# Altium PCB STM32F302VC_EVM.PcbDoc (part 5 of 19)
Units mil, origin at the board's own origin, x right, y up, seen from the top; angles counter-clockwise.
Board outline 3937.01 x 3937.01 mil, 2 copper layers (Top Layer, Bottom Layer); 117 components, 166 nets, 602 pads, 373 vias.
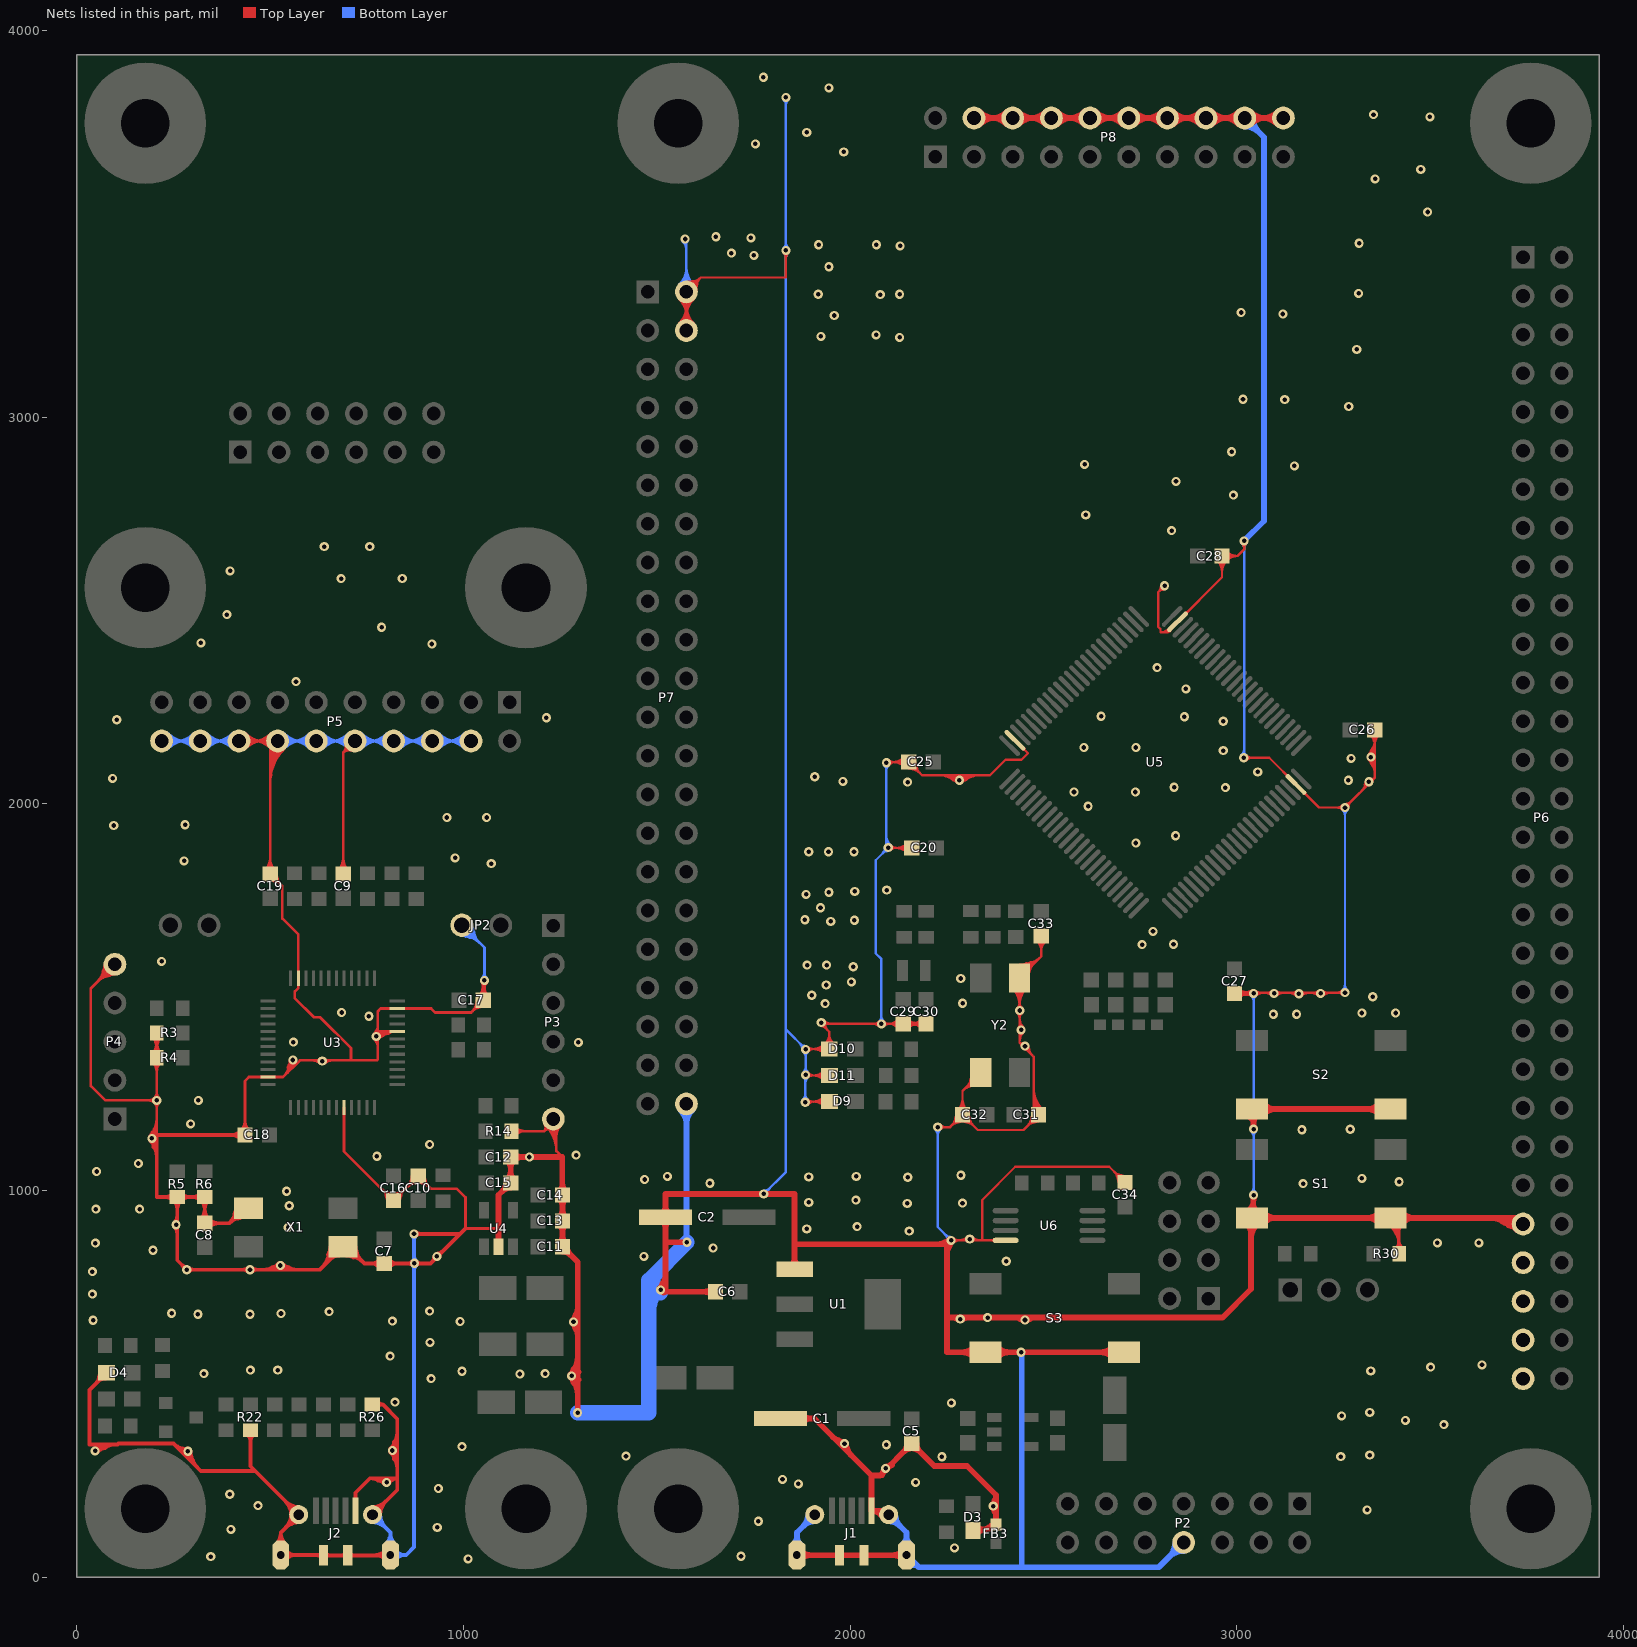
[diagram p5: the nets of this part, all layers, seen from the top]

## Via types
v1: diameter 23.62, hole 11.81, Top Layer to Bottom Layer, tented both sides, 372 vias
v2: diameter 50, hole 28, Top Layer to Bottom Layer, tented both sides, 1 vias

## Nets (pads, with @x,y where several pads share a name; then routed paths per layer and width w, separated by ;. In a path a pad name is that pad's centre, name@x,y a point inside that pad or via, vN(x,y) a via of type N, cw(c..) or ccw(c..) an arc to the next point about the centre after c; other vN are vias at no path point) (continued)
GND: (continued)
  Top Layer w7: P4.5@98.43,1585.04 36.42,1523.03 36.42,1270.54 73.69,1233.27 v1(206.69,1233.27) ; 206.69,1104.33 R4.1@206.69,1343.5 ; P5.16@419.29,2162.6 P5.14@519.29,2162.6 500,2143.31 C19.1@500,1818.9 531.5,1787.4 531.5,1703.58 572.83,1662.24 U3.35@572.83,1549.21 572.83,1523.62 563.98,1514.76 563.98,1497.05 612.98,1448.04 629.4,1448.04 709,1368.44 709,1336.61 ; C18.1@435.04,1143.7 435.04,1283.46 444.88,1293.31 U3.47@494.09,1293.31 533.46,1293.31 ; 511.3,2133.61 ccw(c503.49,2157.85) P5.14@527.88,2165.18 ; v1@551.04,1334.89 cw(c541.64,1331.65) 548.96,1324.92 cw(c558.91,1315.77) v1@558.9,1329.29 ; C9.2@688.98,1818.9 688.98,2132.28 ; U3.8@690.94,1214.57 690.94,1101.38 817.91,974.41 C16.1@818.9,974.41 819.88,974.41 C10.1@882.87,1037.4 915.35,1004.92 982.28,1004.92 1004.92,982.28 1004.92,901.57 1089.57,901.57 ; P5.10@719.29,2162.6 688.98,2132.28 ; 778.54,1411.42 U3.20@828.74,1411.42 ; v1(1054.13,1543.31) 1054.13,1495.08 C17.1@1051.18,1492.13 1019.68,1460.63 926.18,1460.63 916.34,1470.47 U3.23@828.74,1470.47 785.43,1470.47 778.54,1463.58 778.54,1339.57 775.59,1336.61 576.77,1336.61 533.46,1293.31 ; R14.1@1124.02,1153.54 1208.66,1153.54 ; 1255.61,1086.61 1240.16,1102.06 1240.16,1185.04 1208.66,1153.54 ; 53.99,1540.61 cw(c98.43,1496.18) P4.5@98.43,1559.01 ; 53.99,1540.61 ccw(c9.56,1585.04) P4.5@72.4,1585.04 ; 53.99,1540.61 ccw(c9.56,1585.04) P4.5@72.4,1585.04 ; 53.99,1540.61 cw(c98.43,1496.18) P4.5@98.43,1559.01 ; 53.99,1540.61 ccw(c9.56,1585.04) P4.5@72.4,1585.04 ; 53.99,1540.61 cw(c98.43,1496.18) P4.5@98.43,1559.01 ; 64.44,1555.33 cw(c106.84,1543.97) P4.5@98.03,1586.97 ; 64.44,1555.33 cw(c106.84,1543.97) P4.5@98.03,1586.97 ; 64.44,1555.33 cw(c106.84,1543.97) P4.5@98.03,1586.97 ; 65.94,1552.56 cw(c98.43,1520.08) P4.5@98.43,1566.01 ; 65.94,1552.56 ccw(c33.46,1585.04) P4.5@79.4,1585.04 ; 65.94,1552.56 ccw(c33.46,1585.04) P4.5@79.4,1585.04 ; 65.94,1552.56 cw(c98.43,1520.08) P4.5@98.43,1566.01 ; 65.94,1552.56 ccw(c33.46,1585.04) P4.5@79.4,1585.04 ; 65.94,1552.56 cw(c98.43,1520.08) P4.5@98.43,1566.01 ; 67.37,1566.27 cw(c104.29,1556.38) P4.5@96.63,1593.83 ; 67.37,1566.27 cw(c104.29,1556.38) P4.5@96.63,1593.83 ; 67.37,1566.27 cw(c104.29,1556.38) P4.5@96.63,1593.83 ; 68.72,1551.05 ccw(c57.36,1593.45) P4.5@100.36,1584.64 ; 68.72,1551.05 ccw(c57.36,1593.45) P4.5@100.36,1584.64 ; 68.72,1551.05 ccw(c57.36,1593.45) P4.5@100.36,1584.64 ; 72.36,1559.03 ccw(c65,1586.48) P4.5@93.4,1585.26 ; 72.36,1559.03 ccw(c65,1586.48) P4.5@93.4,1585.26 ; 72.36,1559.03 ccw(c65,1586.48) P4.5@93.4,1585.26 ; 72.41,1558.98 cw(c99.87,1551.62) P4.5@98.64,1580.02 ; 72.41,1558.98 cw(c99.87,1551.62) P4.5@98.64,1580.02 ; 72.41,1558.98 cw(c99.87,1551.62) P4.5@98.64,1580.02 ; 79.66,1553.98 ccw(c69.77,1590.91) P4.5@107.22,1583.24 ; 79.66,1553.98 ccw(c69.77,1590.91) P4.5@107.22,1583.24 ; 79.66,1553.98 ccw(c69.77,1590.91) P4.5@107.22,1583.24 ; 186.63,1233.27 cw(c186.63,1213.2) v1@200.82,1227.39 ; 186.63,1233.27 ccw(c186.63,1253.33) v1@200.82,1239.14 ; 186.63,1233.27 ccw(c186.63,1253.33) v1@200.82,1239.14 ; 186.63,1233.27 cw(c186.63,1213.2) v1@200.82,1227.39 ; 186.63,1233.27 ccw(c186.63,1253.33) v1@200.82,1239.14 ; 186.63,1233.27 cw(c186.63,1213.2) v1@200.82,1227.39 ; v1@188.13,1140.72 ccw(c143.33,1185.52) 206.69,1185.52 ; v1@188.13,1140.72 ccw(c143.33,1185.52) 206.69,1185.52 ; v1@188.13,1140.72 ccw(c143.33,1185.52) 206.69,1185.52 ; v1@190.48,1127.32 cw(c178.51,1101.8) 206.69,1101.8 ; v1@190.48,1127.32 cw(c178.51,1101.8) 206.69,1101.8 ; v1@190.48,1127.32 cw(c178.51,1101.8) 206.69,1101.8 ; v1@191.86,1142.87 ccw(c187.79,1158.08) 201.42,1150.2 ; v1@191.86,1142.87 ccw(c187.79,1158.08) 201.42,1150.2 ; v1@191.86,1142.87 ccw(c187.79,1158.08) 201.42,1150.2 ; v1@193.08,1135.77 ccw(c160.23,1168.63) 206.69,1168.63 ; v1@193.08,1135.77 ccw(c160.23,1168.63) 206.69,1168.63 ; v1@193.08,1135.77 ccw(c160.23,1168.63) 206.69,1168.63 ; v1@193.45,1133.66 cw(c183.68,1112.82) 206.69,1112.82 ; v1@193.45,1133.66 cw(c183.68,1112.82) 206.69,1112.82 ; v1@193.45,1133.66 cw(c183.68,1112.82) 206.69,1112.82 ; v1@195.09,1134.11 ccw(c202.62,1128.99) 196.75,1122.03 ; v1@195.09,1134.11 ccw(c202.62,1128.99) 196.75,1122.03 ; v1@195.09,1134.11 ccw(c202.62,1128.99) 196.75,1122.03 ; v1@195.13,1135.52 cw(c208.77,1143.76) 195.23,1152.16 ; v1@195.13,1135.52 cw(c208.77,1143.76) 195.23,1152.16 ; v1@195.13,1135.52 cw(c208.77,1143.76) 195.23,1152.16 ; v1@196.43,1139.99 cw(c188.85,1123.84) 206.69,1123.84 ; v1@196.43,1139.99 cw(c188.85,1123.84) 206.69,1123.84 ; v1@196.43,1139.99 cw(c188.85,1123.84) 206.69,1123.84 ; v1@196.6,1142.74 ccw(c199.42,1151.35) 207.27,1146.82 ; v1@196.6,1142.74 ccw(c199.42,1151.35) 207.27,1146.82 ; v1@196.6,1142.74 ccw(c199.42,1151.35) 207.27,1146.82 ; R4.1@196.64,1331.48 cw(c172.37,1307.21) 206.69,1307.21 ; R4.1@196.64,1331.48 cw(c172.37,1307.21) 206.69,1307.21 ; R4.1@196.64,1331.48 cw(c172.37,1307.21) 206.69,1307.21 ; v1@196.69,1126.97 cw(c198.7,1121.06) 202.73,1125.84 ; v1@196.69,1126.97 cw(c198.7,1121.06) 202.73,1125.84 ; v1@196.69,1126.97 cw(c198.7,1121.06) 202.73,1125.84 ; v1@198.03,1130.82 ccw(c177.13,1151.73) 206.69,1151.73 ; v1@198.03,1130.82 ccw(c177.13,1151.73) 206.69,1151.73 ; v1@198.03,1130.82 ccw(c177.13,1151.73) 206.69,1151.73 ; v1@200.82,1227.39 cw(c186.63,1213.2) 206.69,1213.2 ; v1@200.82,1227.39 cw(c186.63,1213.2) 206.69,1213.2 ; v1@200.82,1227.39 cw(c186.63,1213.2) 206.69,1213.2 ; v1@200.82,1239.14 ccw(c186.63,1253.33) 206.69,1253.33 ; v1@200.82,1239.14 ccw(c186.63,1253.33) 206.69,1253.33 ; v1@200.82,1239.14 ccw(c186.63,1253.33) 206.69,1253.33 ; v1@200.88,1130.17 ccw(c209.07,1124.6) 202.69,1117.03 ; v1@200.88,1130.17 ccw(c209.07,1124.6) 202.69,1117.03 ; v1@200.88,1130.17 ccw(c209.07,1124.6) 202.69,1117.03 ; v1@201.12,1139.14 cw(c219.77,1150.4) 201.26,1161.88 ; v1@201.12,1139.14 cw(c219.77,1150.4) 201.26,1161.88 ; v1@201.12,1139.14 cw(c219.77,1150.4) 201.26,1161.88 ; v1@201.53,1131.31 ccw(c205.69,1129.35) 202.73,1125.84 ; v1@201.53,1131.31 ccw(c205.69,1129.35) 202.73,1125.84 ; v1@201.53,1131.31 ccw(c205.69,1129.35) 202.73,1125.84 ; v1@202.04,1136.99 cw(c225.6,1143.31) 204.47,1155.5 ; v1@202.04,1136.99 cw(c225.6,1143.31) 204.47,1155.5 ; v1@202.04,1136.99 cw(c225.6,1143.31) 204.47,1155.5 ; 206.69,1213.2 cw(c226.76,1213.2) v1@212.57,1227.39 ; 206.69,1213.2 cw(c226.76,1213.2) v1@212.57,1227.39 ; 206.69,1213.2 cw(c226.76,1213.2) v1@212.57,1227.39 ; 206.69,1253.33 ccw(c226.76,1253.33) v1@212.57,1239.14 ; 206.69,1253.33 ccw(c226.76,1253.33) v1@212.57,1239.14 ; 206.69,1253.33 ccw(c226.76,1253.33) v1@212.57,1239.14 ; 206.69,1307.21 cw(c241.01,1307.21) R4.1@216.75,1331.48 ; 206.69,1307.21 cw(c241.01,1307.21) R4.1@216.75,1331.48 ; 206.69,1307.21 cw(c241.01,1307.21) R4.1@216.75,1331.48 ; C18.1@423.59,1155.15 ccw(c395.97,1182.77) 435.04,1182.77 ; C18.1@423.59,1155.15 ccw(c395.97,1182.77) 435.04,1182.77 ; C18.1@423.59,1155.15 ccw(c395.97,1182.77) 435.04,1182.77 ; C18.1@428.54,1150.2 ccw(c412.86,1165.88) 435.04,1165.88 ; C18.1@428.54,1150.2 ccw(c412.86,1165.88) 435.04,1165.88 ; C18.1@428.54,1150.2 ccw(c412.86,1165.88) 435.04,1165.88 ; P5.16@432.75,2149.14 cw(c465.23,2116.66) 465.23,2162.6 ; P5.16@432.75,2149.14 cw(c465.23,2116.66) 465.23,2162.6 ; P5.16@432.75,2149.14 cw(c465.23,2116.66) 465.23,2162.6 ; P5.16@432.75,2176.05 ccw(c465.23,2208.53) 465.23,2162.6 ; P5.16@432.75,2176.05 ccw(c465.23,2208.53) 465.23,2162.6 ; P5.16@432.75,2176.05 ccw(c465.23,2208.53) 465.23,2162.6 ; 435.04,1165.88 ccw(c457.21,1165.88) C18.1@441.53,1150.2 ; 435.04,1165.88 ccw(c457.21,1165.88) C18.1@441.53,1150.2 ; 435.04,1165.88 ccw(c457.21,1165.88) C18.1@441.53,1150.2 ; 435.04,1182.77 ccw(c474.11,1182.77) C18.1@446.48,1155.15 ; 435.04,1182.77 ccw(c474.11,1182.77) C18.1@446.48,1155.15 ; 435.04,1182.77 ccw(c474.11,1182.77) C18.1@446.48,1155.15 ; P5.16@437.7,2144.19 cw(c482.13,2099.76) 482.13,2162.6 ; P5.16@437.7,2144.19 cw(c482.13,2099.76) 482.13,2162.6 ; P5.16@437.7,2144.19 cw(c482.13,2099.76) 482.13,2162.6 ; P5.16@437.7,2181 ccw(c482.13,2225.43) 482.13,2162.6 ; P5.16@437.7,2181 ccw(c482.13,2225.43) 482.13,2162.6 ; P5.16@437.7,2181 ccw(c482.13,2225.43) 482.13,2162.6 ; 456.46,2162.6 cw(c456.46,2099.76) P5.14@500.89,2144.19 ; 456.46,2162.6 ccw(c456.46,2225.43) P5.14@500.89,2181 ; 456.46,2162.6 ccw(c456.46,2225.43) P5.14@500.89,2181 ; 456.46,2162.6 cw(c456.46,2099.76) P5.14@500.89,2144.19 ; 456.46,2162.6 ccw(c456.46,2225.43) P5.14@500.89,2181 ; 456.46,2162.6 cw(c456.46,2099.76) P5.14@500.89,2144.19 ; 473.35,2162.6 cw(c473.35,2116.66) P5.14@505.84,2149.14 ; 473.35,2162.6 ccw(c473.35,2208.53) P5.14@505.84,2176.05 ; 473.35,2162.6 ccw(c473.35,2208.53) P5.14@505.84,2176.05 ; 473.35,2162.6 cw(c473.35,2116.66) P5.14@505.84,2149.14 ; 473.35,2162.6 ccw(c473.35,2208.53) P5.14@505.84,2176.05 ; 473.35,2162.6 cw(c473.35,2116.66) P5.14@505.84,2149.14 ; C19.1@488.56,1830.34 ccw(c460.93,1857.97) 500,1857.97 ; C19.1@488.56,1830.34 ccw(c460.93,1857.97) 500,1857.97 ; C19.1@488.56,1830.34 ccw(c460.93,1857.97) 500,1857.97 ; C19.1@493.51,1825.39 ccw(c477.83,1841.07) 500,1841.07 ; C19.1@493.51,1825.39 ccw(c477.83,1841.07) 500,1841.07 ; C19.1@493.51,1825.39 ccw(c477.83,1841.07) 500,1841.07 ; C19.1@495.28,1817.93 ccw(c519.18,1822.82) C19.1@512.86,1799.27 ; C19.1@495.28,1817.93 ccw(c519.18,1822.82) C19.1@512.86,1799.27 ; C19.1@495.28,1817.93 ccw(c519.18,1822.82) C19.1@512.86,1799.27 ; C19.1@500,1802.71 cw(c500,1763.64) 527.63,1791.27 ; C19.1@500,1802.71 cw(c500,1763.64) 527.63,1791.27 ; C19.1@500,1802.71 cw(c500,1763.64) 527.63,1791.27 ; C19.1@500,1809.71 cw(c500,1787.54) C19.1@515.68,1803.22 ; C19.1@500,1809.71 cw(c500,1787.54) C19.1@515.68,1803.22 ; C19.1@500,1809.71 cw(c500,1787.54) C19.1@515.68,1803.22 ; 500,1841.07 ccw(c522.17,1841.07) C19.1@506.49,1825.39 ; 500,1841.07 ccw(c522.17,1841.07) C19.1@506.49,1825.39 ; 500,1841.07 ccw(c522.17,1841.07) C19.1@506.49,1825.39 ; 500,1857.97 ccw(c539.07,1857.97) C19.1@511.44,1830.34 ; 500,1857.97 ccw(c539.07,1857.97) C19.1@511.44,1830.34 ; 500,1857.97 ccw(c539.07,1857.97) C19.1@511.44,1830.34 ; 500,2053.19 cw(c628.7,2053.19) P5.14@537.7,2144.19 ; 500,2053.19 cw(c628.7,2053.19) P5.14@537.7,2144.19 ; 500,2053.19 cw(c628.7,2053.19) P5.14@537.7,2144.19 ; 500,2070.09 cw(c611.8,2070.09) P5.14@532.75,2149.14 ; 500,2070.09 cw(c611.8,2070.09) P5.14@532.75,2149.14 ; 500,2070.09 cw(c611.8,2070.09) P5.14@532.75,2149.14 ; 500,2086.99 cw(c594.9,2086.99) P5.14@527.8,2154.09 ; 500,2086.99 cw(c594.9,2086.99) P5.14@527.8,2154.09 ; 500,2086.99 cw(c594.9,2086.99) P5.14@527.8,2154.09 ; 500,2103.89 cw(c578,2103.89) P5.14@522.85,2159.04 ; 500,2103.89 cw(c578,2103.89) P5.14@522.85,2159.04 ; 500,2103.89 cw(c578,2103.89) P5.14@522.85,2159.04 ; 500,2120.79 cw(c561.1,2120.79) P5.14@517.9,2163.99 ; 500,2120.79 cw(c561.1,2120.79) P5.14@517.9,2163.99 ; 500,2120.79 cw(c561.1,2120.79) P5.14@517.9,2163.99 ; 500,2137.69 cw(c544.2,2137.69) P5.14@512.95,2168.94 ; 500,2137.69 cw(c544.2,2137.69) P5.14@512.95,2168.94 ; 500,2137.69 cw(c544.2,2137.69) P5.14@512.95,2168.94 ; P5.14@500.46,2144.63 cw(c494.99,2139.42) 501.53,2135.65 ; P5.14@500.46,2144.63 cw(c494.99,2139.42) 501.53,2135.65 ; P5.14@500.46,2144.63 cw(c494.99,2139.42) 501.53,2135.65 ; C19.1@500.97,1823.61 cw(c496.07,1799.72) C19.1@519.63,1806.03 ; C19.1@500.97,1823.61 cw(c496.07,1799.72) C19.1@519.63,1806.03 ; C19.1@500.97,1823.61 cw(c496.07,1799.72) C19.1@519.63,1806.03 ; P5.14@501.52,2143.58 cw(c492.04,2133.44) 504.06,2126.51 ; P5.14@501.52,2143.58 cw(c492.04,2133.44) 504.06,2126.51 ; P5.14@501.52,2143.58 cw(c492.04,2133.44) 504.06,2126.51 ; 501.53,2135.65 cw(c507.18,2132.39) P5.14@509.6,2138.44 ; 501.53,2135.65 cw(c507.18,2132.39) P5.14@509.6,2138.44 ; 501.53,2135.65 cw(c507.18,2132.39) P5.14@509.6,2138.44 ; P5.14@502.81,2142.46 cw(c491.16,2128.22) 507,2118.87 ; P5.14@502.81,2142.46 cw(c491.16,2128.22) 507,2118.87 ; P5.14@502.81,2142.46 cw(c491.16,2128.22) 507,2118.87 ; 504.06,2126.51 cw(c521.59,2116.38) P5.14@520.59,2136.6 ; 504.06,2126.51 cw(c521.59,2116.38) P5.14@520.59,2136.6 ; 504.06,2126.51 cw(c521.59,2116.38) P5.14@520.59,2136.6 ; P5.14@506.3,2148.7 cw(c498.22,2140.05) 508.47,2134.14 ; P5.14@506.3,2148.7 cw(c498.22,2140.05) 508.47,2134.14 ; P5.14@506.3,2148.7 cw(c498.22,2140.05) 508.47,2134.14 ; P5.14@507.24,2147.87 cw(c496.39,2134.61) 511.15,2125.89 ; P5.14@507.24,2147.87 cw(c496.39,2134.61) 511.15,2125.89 ; P5.14@507.24,2147.87 cw(c496.39,2134.61) 511.15,2125.89 ; C19.1@509.18,1818.9 ccw(c531.36,1818.9) C19.1@515.68,1803.22 ; C19.1@509.18,1818.9 ccw(c531.36,1818.9) C19.1@515.68,1803.22 ; C19.1@509.18,1818.9 ccw(c531.36,1818.9) C19.1@515.68,1803.22 ; 511.67,2126.78 cw(c531.53,2115.05) P5.14@525.78,2137.39 ; 511.67,2126.78 cw(c531.53,2115.05) P5.14@525.78,2137.39 ; 511.67,2126.78 cw(c531.53,2115.05) P5.14@525.78,2137.39 ; P5.14@511.67,2153.29 cw(c501.61,2141) 515.29,2132.92 ; P5.14@511.67,2153.29 cw(c501.61,2141) 515.29,2132.92 ; P5.14@511.67,2153.29 cw(c501.61,2141) 515.29,2132.92 ; C19.1@516.18,1818.9 ccw(c555.26,1818.9) 527.63,1791.27 ; C19.1@516.18,1818.9 ccw(c555.26,1818.9) 527.63,1791.27 ; C19.1@516.18,1818.9 ccw(c555.26,1818.9) 527.63,1791.27 ; 533.47,1293.31 ccw(c491.99,1334.78) v1@550.59,1337.25 ; 533.47,1293.31 ccw(c491.99,1334.78) v1@550.59,1337.25 ; 533.47,1293.31 ccw(c491.99,1334.78) v1@550.59,1337.25 ; 544.74,1304.58 ccw(c513.63,1335.69) v1@557.59,1337.54 ; 544.74,1304.58 ccw(c513.63,1335.69) v1@557.59,1337.54 ; 544.74,1304.58 ccw(c513.63,1335.69) v1@557.59,1337.54 ; 546.15,1317.34 cw(c575.99,1310.68) v1@559.6,1336.49 ; 546.15,1317.34 cw(c575.99,1310.68) v1@559.6,1336.49 ; 546.15,1317.34 cw(c575.99,1310.68) v1@559.6,1336.49 ; v1@551.88,1333.14 cw(c538.59,1324.71) 553.95,1321.28 ; v1@551.88,1333.14 cw(c538.59,1324.71) 553.95,1321.28 ; v1@551.88,1333.14 cw(c538.59,1324.71) 553.95,1321.28 ; 552.62,1315.31 cw(c576.42,1309.99) v1@563.35,1330.58 ; 552.62,1315.31 cw(c576.42,1309.99) v1@563.35,1330.58 ; 552.62,1315.31 cw(c576.42,1309.99) v1@563.35,1330.58 ; 556.01,1315.86 ccw(c535.26,1336.6) v1@564.58,1337.84 ; 556.01,1315.86 ccw(c535.26,1336.6) v1@564.58,1337.84 ; 556.01,1315.86 ccw(c535.26,1336.6) v1@564.58,1337.84 ; 610.03,1336.61 cw(c610.03,1309.83) v1@628.97,1328.77 ; 610.03,1336.61 cw(c610.03,1309.83) v1@628.97,1328.77 ; 610.03,1336.61 cw(c610.03,1309.83) v1@628.97,1328.77 ; 619.53,1336.61 ccw(c619.53,1349.96) v1@628.97,1340.52 ; 619.53,1336.61 ccw(c619.53,1349.96) v1@628.97,1340.52 ; 619.53,1336.61 ccw(c619.53,1349.96) v1@628.97,1340.52 ; v1@640.72,1328.77 cw(c659.66,1309.83) 659.66,1336.61 ; v1@640.72,1328.77 cw(c659.66,1309.83) 659.66,1336.61 ; v1@640.72,1328.77 cw(c659.66,1309.83) 659.66,1336.61 ; v1@640.72,1340.52 ccw(c650.15,1349.96) 650.15,1336.61 ; v1@640.72,1340.52 ccw(c650.15,1349.96) 650.15,1336.61 ; v1@640.72,1340.52 ccw(c650.15,1349.96) 650.15,1336.61 ; C9.2@677.53,1830.34 ccw(c649.9,1857.97) 688.98,1857.97 ; C9.2@677.53,1830.34 ccw(c649.9,1857.97) 688.98,1857.97 ; C9.2@677.53,1830.34 ccw(c649.9,1857.97) 688.98,1857.97 ; C9.2@682.48,1825.39 ccw(c666.8,1841.07) 688.98,1841.07 ; C9.2@682.48,1825.39 ccw(c666.8,1841.07) 688.98,1841.07 ; C9.2@682.48,1825.39 ccw(c666.8,1841.07) 688.98,1841.07 ; 688.98,1841.07 ccw(c711.15,1841.07) C9.2@695.47,1825.39 ; 688.98,1841.07 ccw(c711.15,1841.07) C9.2@695.47,1825.39 ; 688.98,1841.07 ccw(c711.15,1841.07) C9.2@695.47,1825.39 ; 688.98,1857.97 ccw(c728.05,1857.97) C9.2@700.42,1830.34 ; 688.98,1857.97 ccw(c728.05,1857.97) C9.2@700.42,1830.34 ; 688.98,1857.97 ccw(c728.05,1857.97) C9.2@700.42,1830.34 ; 688.98,2132.28 cw(c704.74,2116.52) P5.10@711.45,2137.78 ; 688.98,2132.28 ccw(c673.21,2148.05) P5.10@694.47,2154.76 ; 688.98,2132.28 ccw(c673.21,2148.05) P5.10@694.47,2154.76 ; 688.98,2132.28 cw(c704.74,2116.52) P5.10@711.45,2137.78 ; 688.98,2132.28 ccw(c673.21,2148.05) P5.10@694.47,2154.76 ; 688.98,2132.28 cw(c704.74,2116.52) P5.10@711.45,2137.78 ; 697.13,2140.44 cw(c708.65,2128.91) P5.10@713.56,2144.45 ; 697.13,2140.44 ccw(c685.61,2151.96) P5.10@701.15,2156.87 ; 697.13,2140.44 ccw(c685.61,2151.96) P5.10@701.15,2156.87 ; 697.13,2140.44 cw(c708.65,2128.91) P5.10@713.56,2144.45 ; 697.13,2140.44 ccw(c685.61,2151.96) P5.10@701.15,2156.87 ; 697.13,2140.44 cw(c708.65,2128.91) P5.10@713.56,2144.45 ; v1@768.55,1392.8 cw(c744.44,1368.68) 778.54,1368.68 ; v1@768.55,1392.8 cw(c744.44,1368.68) 778.54,1368.68 ; v1@768.55,1392.8 cw(c744.44,1368.68) 778.54,1368.68 ; v1@768.55,1404.55 ccw(c744.44,1428.67) 778.54,1428.67 ; v1@768.55,1404.55 ccw(c744.44,1428.67) 778.54,1428.67 ; v1@768.55,1404.55 ccw(c744.44,1428.67) 778.54,1428.67 ; v1@770.41,1402.7 cw(c791.45,1381.66) 791.45,1411.42 ; v1@770.41,1402.7 cw(c791.45,1381.66) 791.45,1411.42 ; v1@770.41,1402.7 cw(c791.45,1381.66) 791.45,1411.42 ; v1@773.5,1397.75 cw(c761.34,1385.58) 778.54,1385.58 ; v1@773.5,1397.75 cw(c761.34,1385.58) 778.54,1385.58 ; v1@773.5,1397.75 cw(c761.34,1385.58) 778.54,1385.58 ; v1@773.5,1399.6 ccw(c761.34,1411.77) 778.54,1411.77 ; v1@773.5,1399.6 ccw(c761.34,1411.77) 778.54,1411.77 ; v1@773.5,1399.6 ccw(c761.34,1411.77) 778.54,1411.77 ; v1@775.11,1399.8 ccw(c783.34,1413.46) 791.75,1399.91 ; v1@775.11,1399.8 ccw(c783.34,1413.46) 791.75,1399.91 ; v1@775.11,1399.8 ccw(c783.34,1413.46) 791.75,1399.91 ; v1@775.36,1397.75 cw(c808.35,1364.76) 808.35,1411.42 ; v1@775.36,1397.75 cw(c808.35,1364.76) 808.35,1411.42 ; v1@775.36,1397.75 cw(c808.35,1364.76) 808.35,1411.42 ; v1@776.58,1406.71 ccw(c782.89,1430.26) 795.09,1409.14 ; v1@776.58,1406.71 ccw(c782.89,1430.26) 795.09,1409.14 ; v1@776.58,1406.71 ccw(c782.89,1430.26) 795.09,1409.14 ; v1@778.72,1405.8 ccw(c789.97,1424.46) 801.47,1405.95 ; v1@778.72,1405.8 ccw(c789.97,1424.46) 801.47,1405.95 ; v1@778.72,1405.8 ccw(c789.97,1424.46) 801.47,1405.95 ; v1@780.31,1392.8 cw(c825.25,1347.86) U3.20@825.25,1411.42 ; v1@780.31,1392.8 cw(c825.25,1347.86) U3.20@825.25,1411.42 ; v1@780.31,1392.8 cw(c825.25,1347.86) U3.20@825.25,1411.42 ; v1@782.34,1401.22 cw(c791.09,1404.03) 786.5,1411.99 ; v1@782.34,1401.22 cw(c791.09,1404.03) 786.5,1411.99 ; v1@782.34,1401.22 cw(c791.09,1404.03) 786.5,1411.99 ; v1@782.46,1396.53 cw(c797.66,1392.45) 789.79,1406.08 ; v1@782.46,1396.53 cw(c797.66,1392.45) 789.79,1406.08 ; v1@782.46,1396.53 cw(c797.66,1392.45) 789.79,1406.08 ; 789.59,1002.74 ccw(c818.9,1032.05) C16.1@818.9,990.59 ; 789.59,1002.74 ccw(c818.9,1032.05) C16.1@818.9,990.59 ; 789.59,1002.74 ccw(c818.9,1032.05) C16.1@818.9,990.59 ; 791.96,1000.36 cw(c766.02,974.41) C16.1@802.71,974.41 ; 791.96,1000.36 cw(c766.02,974.41) C16.1@802.71,974.41 ; 791.96,1000.36 cw(c766.02,974.41) C16.1@802.71,974.41 ; C16.1@799.37,986.87 ccw(c822.29,993.01) C16.1@818.03,969.67 ; C16.1@799.37,986.87 ccw(c822.29,993.01) C16.1@818.03,969.67 ; C16.1@799.37,986.87 ccw(c822.29,993.01) C16.1@818.03,969.67 ; C16.1@801.54,990.79 ccw(c818.9,1008.15) C16.1@818.9,983.59 ; C16.1@801.54,990.79 ccw(c818.9,1008.15) C16.1@818.9,983.59 ; C16.1@801.54,990.79 ccw(c818.9,1008.15) C16.1@818.9,983.59 ; C16.1@803.91,988.41 cw(c789.92,974.41) C16.1@809.71,974.41 ; C16.1@803.91,988.41 cw(c789.92,974.41) C16.1@809.71,974.41 ; C16.1@803.91,988.41 cw(c789.92,974.41) C16.1@809.71,974.41 ; 805.4,1406.1 ccw(c802.32,1417.58) U3.20@812.61,1411.64 ; 805.4,1406.1 ccw(c802.32,1417.58) U3.20@812.61,1411.64 ; 805.4,1406.1 ccw(c802.32,1417.58) U3.20@812.61,1411.64 ; 805.63,994.15 cw(c799.14,969.93) C16.1@823.59,975.47 ; 805.63,994.15 cw(c799.14,969.93) C16.1@823.59,975.47 ; 805.63,994.15 cw(c799.14,969.93) C16.1@823.59,975.47 ; C16.1@814.2,975.47 cw(c838.66,969.93) 832.17,994.15 ; C16.1@814.2,975.47 cw(c838.66,969.93) 832.17,994.15 ; C16.1@814.2,975.47 cw(c838.66,969.93) 832.17,994.15 ; C16.1@818.9,983.59 ccw(c818.9,1008.15) C16.1@836.26,990.79 ; C16.1@818.9,983.59 ccw(c818.9,1008.15) C16.1@836.26,990.79 ; C16.1@818.9,983.59 ccw(c818.9,1008.15) C16.1@836.26,990.79 ; C16.1@818.9,990.59 ccw(c818.9,1032.05) 848.21,1002.74 ; C16.1@818.9,990.59 ccw(c818.9,1032.05) 848.21,1002.74 ; C16.1@818.9,990.59 ccw(c818.9,1032.05) 848.21,1002.74 ; C16.1@819.76,969.67 ccw(c815.51,993.01) C16.1@838.42,986.87 ; C16.1@819.76,969.67 ccw(c815.51,993.01) C16.1@838.42,986.87 ; C16.1@819.76,969.67 ccw(c815.51,993.01) C16.1@838.42,986.87 ; C16.1@828.08,974.41 cw(c847.88,974.41) C16.1@833.88,988.41 ; C16.1@828.08,974.41 cw(c847.88,974.41) C16.1@833.88,988.41 ; C16.1@828.08,974.41 cw(c847.88,974.41) C16.1@833.88,988.41 ; C16.1@835.08,974.41 cw(c871.78,974.41) 845.83,1000.36 ; C16.1@835.08,974.41 cw(c871.78,974.41) 845.83,1000.36 ; C16.1@835.08,974.41 cw(c871.78,974.41) 845.83,1000.36 ; 855.24,1009.77 cw(c882.87,982.14) C10.1@882.87,1021.22 ; 855.24,1009.77 ccw(c827.62,1037.4) C10.1@866.69,1037.4 ; 855.24,1009.77 ccw(c827.62,1037.4) C10.1@866.69,1037.4 ; 855.24,1009.77 cw(c882.87,982.14) C10.1@882.87,1021.22 ; 855.24,1009.77 ccw(c827.62,1037.4) C10.1@866.69,1037.4 ; 855.24,1009.77 cw(c882.87,982.14) C10.1@882.87,1021.22 ; C10.1@863.24,1024.54 cw(c886.8,1018.22) C10.1@881.91,1042.12 ; C10.1@863.24,1024.54 cw(c886.8,1018.22) C10.1@881.91,1042.12 ; C10.1@863.24,1024.54 cw(c886.8,1018.22) C10.1@881.91,1042.12 ; C10.1@867.19,1021.72 cw(c882.87,1006.04) C10.1@882.87,1028.22 ; C10.1@867.19,1021.72 ccw(c851.51,1037.4) C10.1@873.69,1037.4 ; C10.1@867.19,1021.72 ccw(c851.51,1037.4) C10.1@873.69,1037.4 ; C10.1@867.19,1021.72 cw(c882.87,1006.04) C10.1@882.87,1028.22 ; C10.1@867.19,1021.72 ccw(c851.51,1037.4) C10.1@873.69,1037.4 ; C10.1@867.19,1021.72 cw(c882.87,1006.04) C10.1@882.87,1028.22 ; C10.1@870.01,1017.77 ccw(c863.7,1041.33) C10.1@887.59,1036.44 ; C10.1@870.01,1017.77 ccw(c863.7,1041.33) C10.1@887.59,1036.44 ; C10.1@870.01,1017.77 ccw(c863.7,1041.33) C10.1@887.59,1036.44 ; C10.1@878.16,1036.44 ccw(c902.05,1041.33) C10.1@895.74,1017.77 ; C10.1@878.16,1036.44 ccw(c902.05,1041.33) C10.1@895.74,1017.77 ; C10.1@878.16,1036.44 ccw(c902.05,1041.33) C10.1@895.74,1017.77 ; C10.1@882.87,1021.22 cw(c882.87,982.14) 910.5,1009.77 ; C10.1@882.87,1021.22 cw(c882.87,982.14) 910.5,1009.77 ; C10.1@882.87,1021.22 cw(c882.87,982.14) 910.5,1009.77 ; C10.1@882.87,1028.22 cw(c882.87,1006.04) C10.1@898.55,1021.72 ; C10.1@882.87,1028.22 cw(c882.87,1006.04) C10.1@898.55,1021.72 ; C10.1@882.87,1028.22 cw(c882.87,1006.04) C10.1@898.55,1021.72 ; C10.1@883.84,1042.12 cw(c878.95,1018.22) C10.1@902.51,1024.54 ; C10.1@883.84,1042.12 cw(c878.95,1018.22) C10.1@902.51,1024.54 ; C10.1@883.84,1042.12 cw(c878.95,1018.22) C10.1@902.51,1024.54 ; C10.1@892.06,1037.4 ccw(c914.23,1037.4) C10.1@898.55,1021.72 ; C10.1@892.06,1037.4 ccw(c914.23,1037.4) C10.1@898.55,1021.72 ; C10.1@892.06,1037.4 ccw(c914.23,1037.4) C10.1@898.55,1021.72 ; C10.1@899.06,1037.4 ccw(c938.13,1037.4) 910.5,1009.77 ; C10.1@899.06,1037.4 ccw(c938.13,1037.4) 910.5,1009.77 ; C10.1@899.06,1037.4 ccw(c938.13,1037.4) 910.5,1009.77 ; 1023.55,1464.5 cw(c1051.18,1436.87) C17.1@1051.18,1475.94 ; 1023.55,1464.5 ccw(c995.92,1492.13) C17.1@1035,1492.13 ; 1023.55,1464.5 ccw(c995.92,1492.13) C17.1@1035,1492.13 ; 1023.55,1464.5 cw(c1051.18,1436.87) C17.1@1051.18,1475.94 ; 1023.55,1464.5 ccw(c995.92,1492.13) C17.1@1035,1492.13 ; 1023.55,1464.5 cw(c1051.18,1436.87) C17.1@1051.18,1475.94 ; C17.1@1031.55,1479.26 cw(c1055.11,1472.95) C17.1@1050.21,1496.84 ; C17.1@1031.55,1479.26 cw(c1055.11,1472.95) C17.1@1050.21,1496.84 ; C17.1@1031.55,1479.26 cw(c1055.11,1472.95) C17.1@1050.21,1496.84 ; C17.1@1035.5,1476.45 cw(c1051.18,1460.77) C17.1@1051.18,1482.94 ; C17.1@1035.5,1476.45 ccw(c1019.82,1492.13) C17.1@1042,1492.13 ; C17.1@1035.5,1476.45 ccw(c1019.82,1492.13) C17.1@1042,1492.13 ; C17.1@1035.5,1476.45 cw(c1051.18,1460.77) C17.1@1051.18,1482.94 ; C17.1@1035.5,1476.45 ccw(c1019.82,1492.13) C17.1@1042,1492.13 ; C17.1@1035.5,1476.45 cw(c1051.18,1460.77) C17.1@1051.18,1482.94 ; C17.1@1038.32,1472.49 ccw(c1032,1496.05) C17.1@1055.9,1491.16 ; C17.1@1038.32,1472.49 ccw(c1032,1496.05) C17.1@1055.9,1491.16 ; C17.1@1038.32,1472.49 ccw(c1032,1496.05) C17.1@1055.9,1491.16 ; C17.1@1039.74,1503.57 ccw(c1004.98,1538.33) v1@1054.13,1538.33 ; C17.1@1039.74,1503.57 ccw(c1004.98,1538.33) v1@1054.13,1538.33 ; C17.1@1039.74,1503.57 ccw(c1004.98,1538.33) v1@1054.13,1538.33 ; C17.1@1044.69,1498.62 ccw(c1021.88,1521.43) 1054.13,1521.43 ; C17.1@1044.69,1498.62 ccw(c1021.88,1521.43) 1054.13,1521.43 ; C17.1@1044.69,1498.62 ccw(c1021.88,1521.43) 1054.13,1521.43 ; v1@1046.94,1539.15 cw(c1025.75,1526.92) 1049.38,1520.59 ; v1@1046.94,1539.15 cw(c1025.75,1526.92) 1049.38,1520.59 ; v1@1046.94,1539.15 cw(c1025.75,1526.92) 1049.38,1520.59 ; v1@1046.94,1539.15 cw(c1025.75,1526.92) 1049.38,1520.59 ; v1@1046.94,1539.15 cw(c1025.75,1526.92) 1049.38,1520.59 ; v1@1046.94,1539.15 cw(c1025.75,1526.92) 1049.38,1520.59 ; v1@1048.26,1537.43 cw(c1034.07,1523.24) 1054.13,1523.24 ; v1@1048.26,1537.43 cw(c1034.07,1523.24) 1054.13,1523.24 ; v1@1048.26,1537.43 cw(c1034.07,1523.24) 1054.13,1523.24 ; 1050.99,1526.6 cw(c1066.12,1522.54) v1@1058.29,1536.11 ; 1050.99,1526.6 cw(c1066.12,1522.54) v1@1058.29,1536.11 ; 1050.99,1526.6 cw(c1066.12,1522.54) v1@1058.29,1536.11 ; 1050.99,1526.6 cw(c1066.12,1522.54) v1@1058.29,1536.11 ; 1050.99,1526.6 cw(c1066.12,1522.54) v1@1058.29,1536.11 ; 1050.99,1526.6 cw(c1066.12,1522.54) v1@1058.29,1536.11 ; 1054.13,1523.24 cw(c1074.2,1523.24) v1@1060.01,1537.43 ; 1054.13,1523.24 cw(c1074.2,1523.24) v1@1060.01,1537.43 ; 1054.13,1523.24 cw(c1074.2,1523.24) v1@1060.01,1537.43 ; 1054.13,1524.07 ccw(c1083.13,1524.07) C17.1@1062.63,1503.57 ; 1054.13,1524.07 ccw(c1083.13,1524.07) C17.1@1062.63,1503.57 ; 1054.13,1524.07 ccw(c1083.13,1524.07) C17.1@1062.63,1503.57 ; R14.1@1134.07,1143.49 cw(c1158.34,1119.22) 1158.34,1153.54 ; R14.1@1134.07,1143.49 cw(c1158.34,1119.22) 1158.34,1153.54 ; R14.1@1134.07,1143.49 cw(c1158.34,1119.22) 1158.34,1153.54 ; R14.1@1134.07,1163.6 ccw(c1158.34,1187.87) 1158.34,1153.54 ; R14.1@1134.07,1163.6 ccw(c1158.34,1187.87) 1158.34,1153.54 ; R14.1@1134.07,1163.6 ccw(c1158.34,1187.87) 1158.34,1153.54 ; 1208.66,1153.54 cw(c1223.74,1138.47) P3.6@1227.59,1159.44 ; 1208.66,1153.54 ccw(c1198.9,1163.31) P3.6@1210.47,1170.84 ; 1208.66,1153.54 ccw(c1198.9,1163.31) P3.6@1210.47,1170.84 ; 1208.66,1153.54 cw(c1223.74,1138.47) P3.6@1227.59,1159.44 ; 1208.66,1153.54 ccw(c1198.9,1163.31) P3.6@1210.47,1170.84 ; 1208.66,1153.54 cw(c1223.74,1138.47) P3.6@1227.59,1159.44 ; P3.6@1213.88,1166.64 cw(c1150.44,1103.19) 1240.16,1103.19 ; P3.6@1213.88,1166.64 cw(c1150.44,1103.19) 1240.16,1103.19 ; P3.6@1213.88,1166.64 cw(c1150.44,1103.19) 1240.16,1103.19 ; 1214.77,1159.65 ccw(c1206.3,1168.12) P3.6@1216.34,1174.66 ; 1214.77,1159.65 ccw(c1206.3,1168.12) P3.6@1216.34,1174.66 ; 1214.77,1159.65 ccw(c1206.3,1168.12) P3.6@1216.34,1174.66 ; P3.6@1218.83,1171.58 cw(c1167.34,1120.09) 1240.16,1120.09 ; P3.6@1218.83,1171.58 cw(c1167.34,1120.09) 1240.16,1120.09 ; P3.6@1218.83,1171.58 cw(c1167.34,1120.09) 1240.16,1120.09 ; P3.6@1223.78,1176.53 cw(c1184.24,1136.99) 1240.16,1136.99 ; P3.6@1223.78,1176.53 cw(c1184.24,1136.99) 1240.16,1136.99 ; P3.6@1223.78,1176.53 cw(c1184.24,1136.99) 1240.16,1136.99 ; P3.6@1228.73,1181.48 cw(c1201.14,1153.89) 1240.16,1153.89 ; P3.6@1228.73,1181.48 cw(c1201.14,1153.89) 1240.16,1153.89 ; P3.6@1228.73,1181.48 cw(c1201.14,1153.89) 1240.16,1153.89 ; 1240.16,1141.21 cw(c1276.11,1141.21) P3.6@1250.69,1166.64 ; 1240.16,1141.21 cw(c1276.11,1141.21) P3.6@1250.69,1166.64 ; 1240.16,1141.21 cw(c1276.11,1141.21) P3.6@1250.69,1166.64